# EAGLE board Wk12CAD (EAGLE 9.7.0)
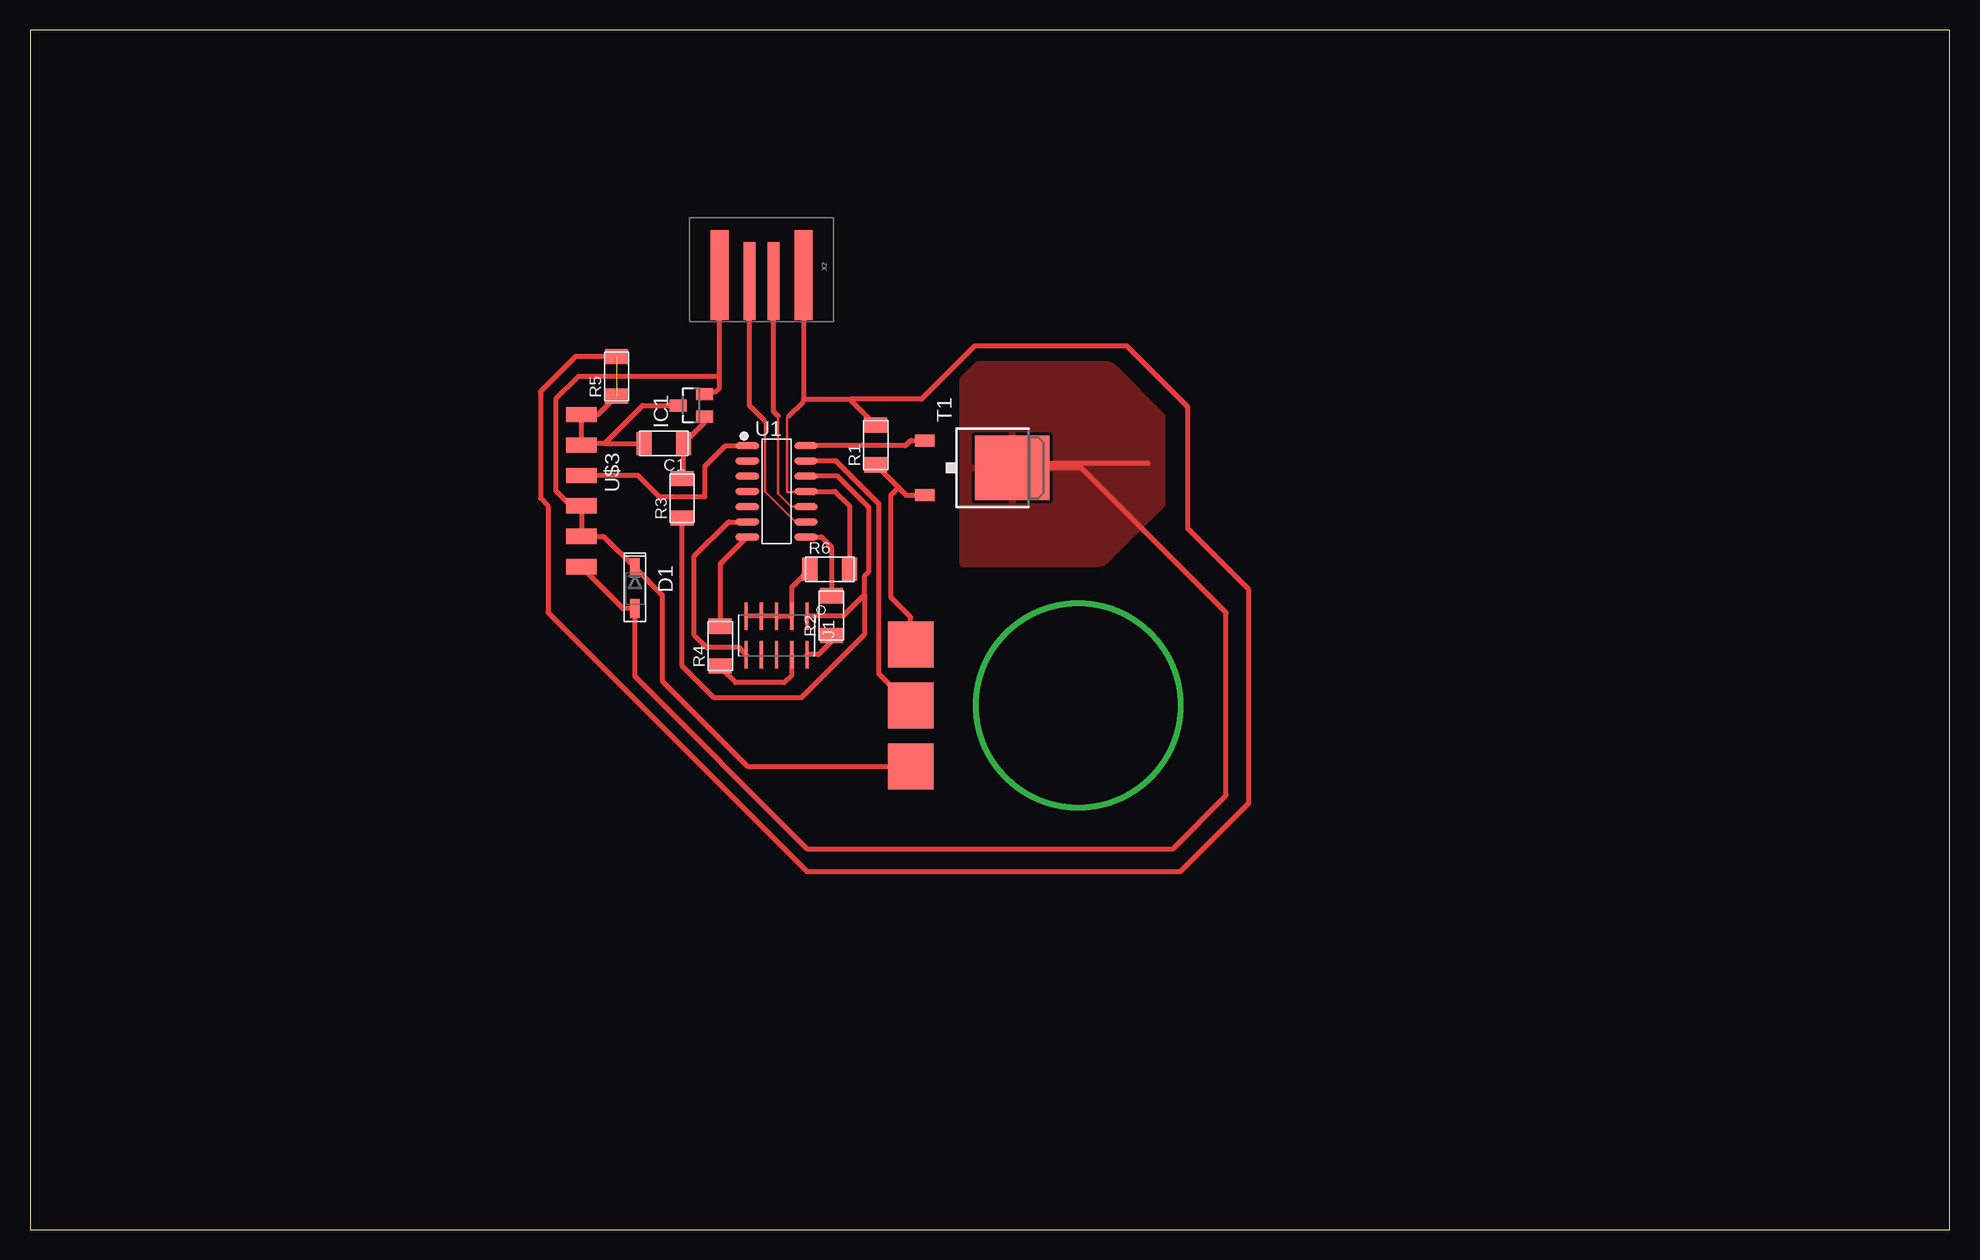
[diagram p0: board, top side]
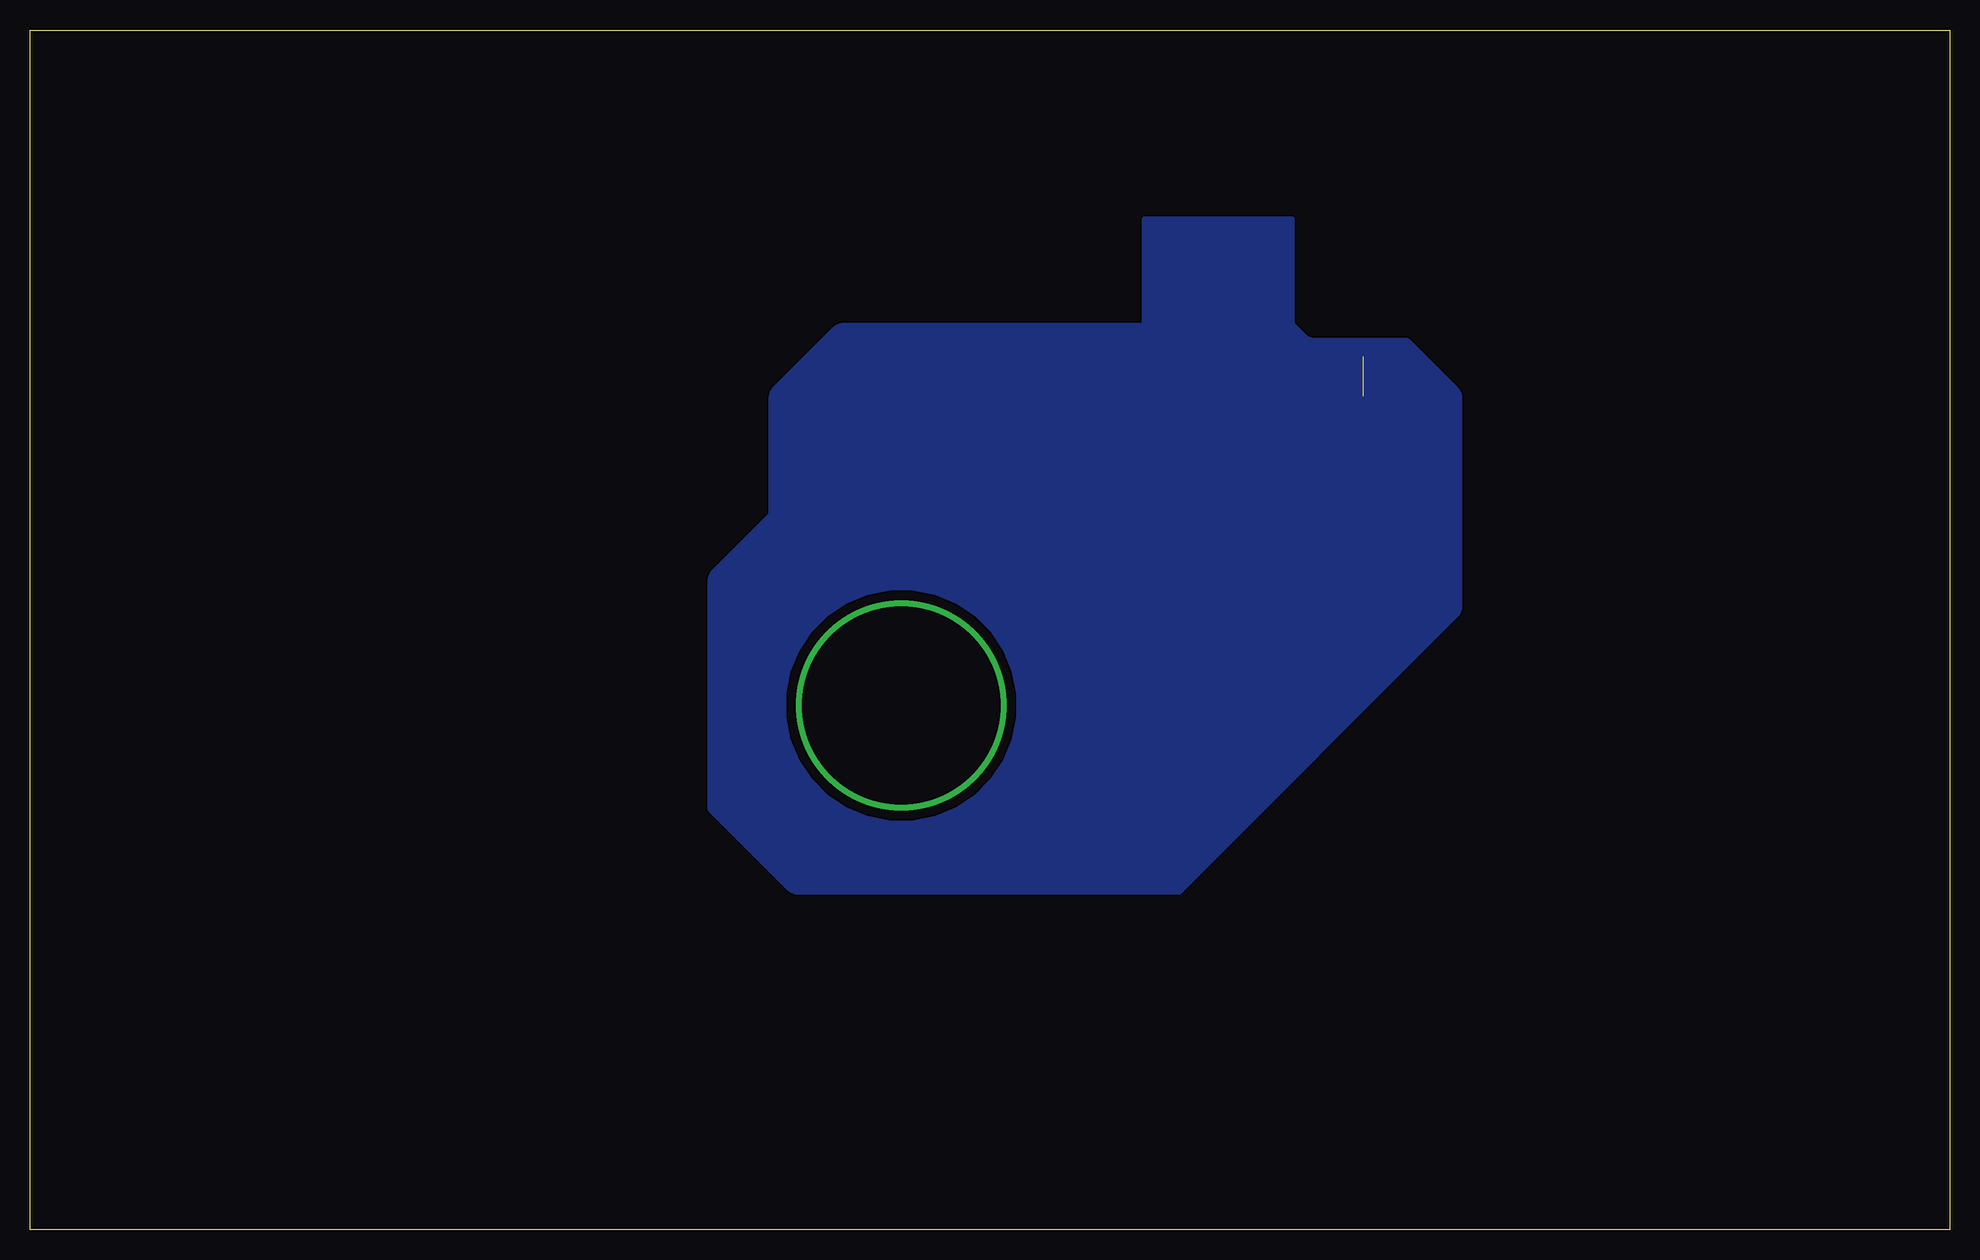
[diagram p1: board, bottom side, seen from below]

Size 160 x 100 mm. Coordinates in mm from the lower left corner, seen from the top.
Outline: 0,0 160,0 160,100 0,100 0,0
Copper layers (1*16): Top 0.035mm / dielectric 1.5mm / Bottom 0.035mm
Design rules "default *": minimum track width 6mil, minimum drill 0.35mm, track to track 16mil, track to pad 16mil, pad to pad 16mil, via to via 16mil, smd to smd 16mil, copper to edge 40mil, drill to drill 6mil, minimum pad ring 10mil, minimum via ring 8mil, stop-mask expansion 4mil, vias tented up to drill 0mil, thermal gap 10mil

## Footprints (pad centres in the part's own frame; a part is rotated, then mirrored left to right if it is on the bottom)
C1206FAB = smd 1.27 x 1.905: 1 -1.651,0; 2 1.651,0
SOD123 = smd 1.6 x 0.8: ANODE 1.7,0; CATHODE -1.7,0
SOT23 = smd 1 x 1.4: 1 -0.95,-1.1; 2 0.95,-1.1; 3 0,1.1
2X5_1.27MM_SMD = smd 2.286 x 0.254: 1 -1.6,2.54; 2 1.6,2.54; 3 -1.6,1.27; 4 1.6,1.27; 5 -1.6,0; 6 1.6,0; 7 -1.6,-1.27; 8 1.6,-1.27; 9 -1.6,-2.54; 10 1.6,-2.54
R1206FAB = smd 1.27 x 1.905: 1 -1.651,0; 2 1.651,0
TO252 = smd 1 x 1.6: 1 -2.28,-4.8; 3 2.28,-4.8 | smd 5.4 x 6.2: 2 0,2.5
SOIC127P600X160-14N = smd 2 x 0.6: 1 -2.45,3.81; 2 -2.45,2.54; 3 -2.45,1.27; 4 -2.45,0; 5 -2.45,-1.27; 6 -2.45,-2.54; 7 -2.45,-3.81; 8 2.45,-3.81; 9 2.45,-2.54; 10 2.45,-1.27; 11 2.45,0; 12 2.45,1.27; 13 2.45,2.54; 14 2.45,3.81
PONTENTIOMETER = smd 3.81 x 3.81: GND 5.08,1.524; OUTPUT 0,1.524; VCC -5.08,1.524 | drill 16.51: P$7 0,-12.446
1X06SMD = smd 2.54 x 1.27: 1 0,6.35; 2 0,3.81; 3 0,1.27; 4 0,-1.27; 5 0,-3.81; 6 0,-6.35
USB-A-PCB = smd 7.5 x 1.5: 5V -0.2,-3.5; GND -0.2,3.5 | smd 6.5 x 1: USB_M 0.3,-1; USB_P 0.3,1

## Placement (x,y rotation side)
C1  [C1206FAB]  52.83,65.53 180 top
D1  [SOD123]  50.42,53.47 270 top
IC1  [SOT23]  55.12,68.71 90 top
J1  [2X5_1.27MM_SMD]  62.23,49.53 270 top
R1  [R1206FAB]  70.48,65.41 90 top
R2  [R1206FAB]  66.8,51.18 90 top
R3  [R1206FAB]  54.36,60.96 90 top
R4  [R1206FAB]  57.53,48.64 90 top
R5  [R1206FAB]  48.9,71.12 90 top
R6  [R1206FAB]  66.66,55.05 0 top
T1  [TO252]  79.38,63.5 270 top
U1  UC_ATSAMD11C14A-SSUT  [SOIC127P600X160-14N]  62.23,61.54 0 top
U$1  [PONTENTIOMETER]  74.93,43.69 90 top
U$3  CONN_06_FTDI-SMD-HEADER  [1X06SMD]  45.97,61.59 180 top
X2  CONN_USBPCB  [USB-A-PCB]  60.96,79.38 270 top

## Library data of the parts
C1 D1 IC1 R1-R6 T1 U$3 X2 = fab
J1 = fab; PACKAGE: 2x5_1.27MM_SMD
U1 = fab; AVAILABILITY: In Stock; DESCRIPTION: ARM® Cortex®-M0+ SAM D11C Microcontroller IC 32-Bit 48MHz 16KB (16K x 8) FLASH 14-SOIC; MF: Microchip; MP: ATSAMD11C14A-SSUT; PACKAGE: SOIC-14 Microchip; PRICE: None; PURCHASE-URL: https://pricing.snapeda.com/search/part/ATSAMD11C14A-SSUT/?ref=eda
U$1 = LibraryPONTENTIOMETER

## Nets
CLK: R4.2 U1.7
D+: U1.10 X2.USB_P
D-: U1.9 X2.USB_M
DIO: R2.2 U1.8
GND: C1.2 IC1.3 R1.2 R5.1 R5.2 R6.2 U1.11 U$3.5 U$3.6 X2.GND
GND1: R1.1 T1.3 U$1.GND
MOTOR: D1.ANODE T1.2 U$3.1
N$2: J1.3 J1.5 J1.7 J1.9 R6.1
N$3: J1.2 R2.1
OUT: C1.1 IC1.1 R3.2
PA2: U1.13 U$1.OUTPUT
PA4: T1.1 U1.14
PA5: U1.1 U$3.4
PA14: U1.4
PA15: U1.5
RESET: J1.10 U1.6
SWDCLK: J1.4 R4.1
VCC: D1.CATHODE IC1.2 U$1.VCC U$3.2 U$3.3 X2.5V
VDD: J1.1 R3.1 U1.12

## Tracks (layer width: path | path; a pad name or v marks a point on that pad's centre or on a via)
CLK
  Top 0.406: R4.2 57.53,55.48 U1.7
D+
  Top 0.203: U1.10 63.43,60.27 62.36,61.34 62.36,67.82
  Top 0.406: X2.USB_P 61.98,79.06 61.98,68.2 62.36,67.82
D-
  Top 0.203: U1.9 63.81,59 61.29,61.52 61.29,67.36 61.21,67.44
  Top 0.406: X2.USB_M 59.96,68.69 61.21,67.44
DIO
  Top 0.406: R2.2 66.8,56.9 65.97,57.73 U1.8
GND  (1 unrouted)
  Top 0.203: 63.25,67.82 63.12,67.69 63.12,61.47 64.61,61.47 U1.11
  Top 0.406: IC1.3 51.05,68.71 47.88,65.53 | 47.88,65.53 C1.2 | 47.88,65.53 46.1,65.53 U$3.5 U$3.6 47.37,67.94 R5.1 | 64.46,69.22 64.46,69.03 63.25,67.82 | R6.2 68.31,60.34 67.11,61.54 U1.11 | 64.46,69.22 68.33,69.22 | 68.33,69.22 R1.2 | X2.GND 64.46,69.22 | 48.64,73.03 R5.2 45.47,72.77 42.55,69.85 42.55,60.96 43.18,60.33 43.18,51.44 64.77,29.84 95.89,29.84 101.6,35.56 101.6,53.34 96.52,58.42 96.52,68.58 91.44,73.66 78.74,73.66 74.3,69.22 68.33,69.22
GND1
  Top 0.406: R1.1 72.38,61.85 | 72.38,61.85 73.02,61.22 T1.3 | U$1.GND 73.41,51.05 71.75,52.7 71.75,61.23 72.38,61.85
MOTOR
  Top 0.406: 93.22,63.88 82.26,63.88 T1.2 87.63,63.5 99.69,51.44 99.69,36.2 95.25,31.75 64.77,31.75 50.42,46.1 D1.ANODE 49.45,51.77 U$3.1
  pour Top (isolate 0.813, rank 5): 77.47,72.39 89.64,72.39 arc-45 90.54,72.02 94.61,67.94 94.61,60.33 89.91,55.62 arc-45 89.01,55.24 77.47,55.24
N$2
  Top 0.406: J1.9 J1.7 J1.5 J1.3 63.5,53.55 R6.1
N$3
  Top 0.406: J1.2 65.71,47.93 66.8,49.02 R2.1
OUT
  Top 0.406: IC1.1 56.22,67.27 C1.1 54.48,62.74 R3.2
OUTLINE
  pour Bottom (isolate 0.813): 54.61,84.45 54.61,75.56 53.71,74.67 arc-45 52.81,74.3 45.09,74.3 41.01,70.22 arc45 40.64,69.32 40.64,51.96 arc45 41.01,51.06 64.14,27.94 95.99,27.94 arc45 96.89,28.31 103.5,34.92 103.5,54.08 arc45 103.13,54.98 98.42,59.69 98.42,69.32 arc45 98.05,70.22 93.08,75.19 arc45 92.18,75.56 67.31,75.56 67.31,84.45
PA2
  Top 0.406: U$1.OUTPUT 70.75,46.35 70.75,60.53 67.2,64.08 U1.13
PA4
  Top 0.406: U1.14 72.97,65.35 73.4,65.78 T1.1
PA5
  Top 0.406: U1.1 57.98,65.35 56.26,63.63 56.26,61.09 52.45,61.09 50.67,62.87 U$3.4
RESET
  Top 0.406: J1.10 59.11,48.51 56.39,48.51 55.37,49.53 55.37,56.13 58.24,59 U1.6
SWDCLK
  Top 0.406: J1.4 63.5,46.23 62.87,45.59 58.8,45.59 57.78,46.61 57.53,46.86 R4.1
VCC
  Top 0.406: 57.46,71.12 X2.5V | 45.92,57.83 U$3.2 | U$3.2 U$3.3 45.09,60.33 43.81,61.59 43.81,69.22 45.72,71.12 57.46,71.12 | U$1.VCC 59.82,38.61 52.7,45.72 52.7,52.88 D1.CATHODE 47.8,57.78 U$3.2 | IC1.2 56.41,69.85 57.15,69.85 57.46,70.16 57.46,71.12
VDD
  Top 0.406: J1.1 67.77,51.13 69.57,52.93 | 69.57,52.93 69.6,52.96 69.6,49.66 64.26,44.32 57.02,44.32 54.36,46.99 R3.1 | 69.57,52.93 69.57,54.5 69.93,54.87 69.93,60.19 67.32,62.81 U1.12